# Altium PCB Ultrasound.PcbDoc
Units mm, origin at the board's own origin, x right, y up, seen from the top; angles counter-clockwise.
Board outline 152.4 x 101.6 mm, 2 copper layers (Top Layer, Bottom Layer); 4 components, 4 nets, 10 pads, 2 vias.
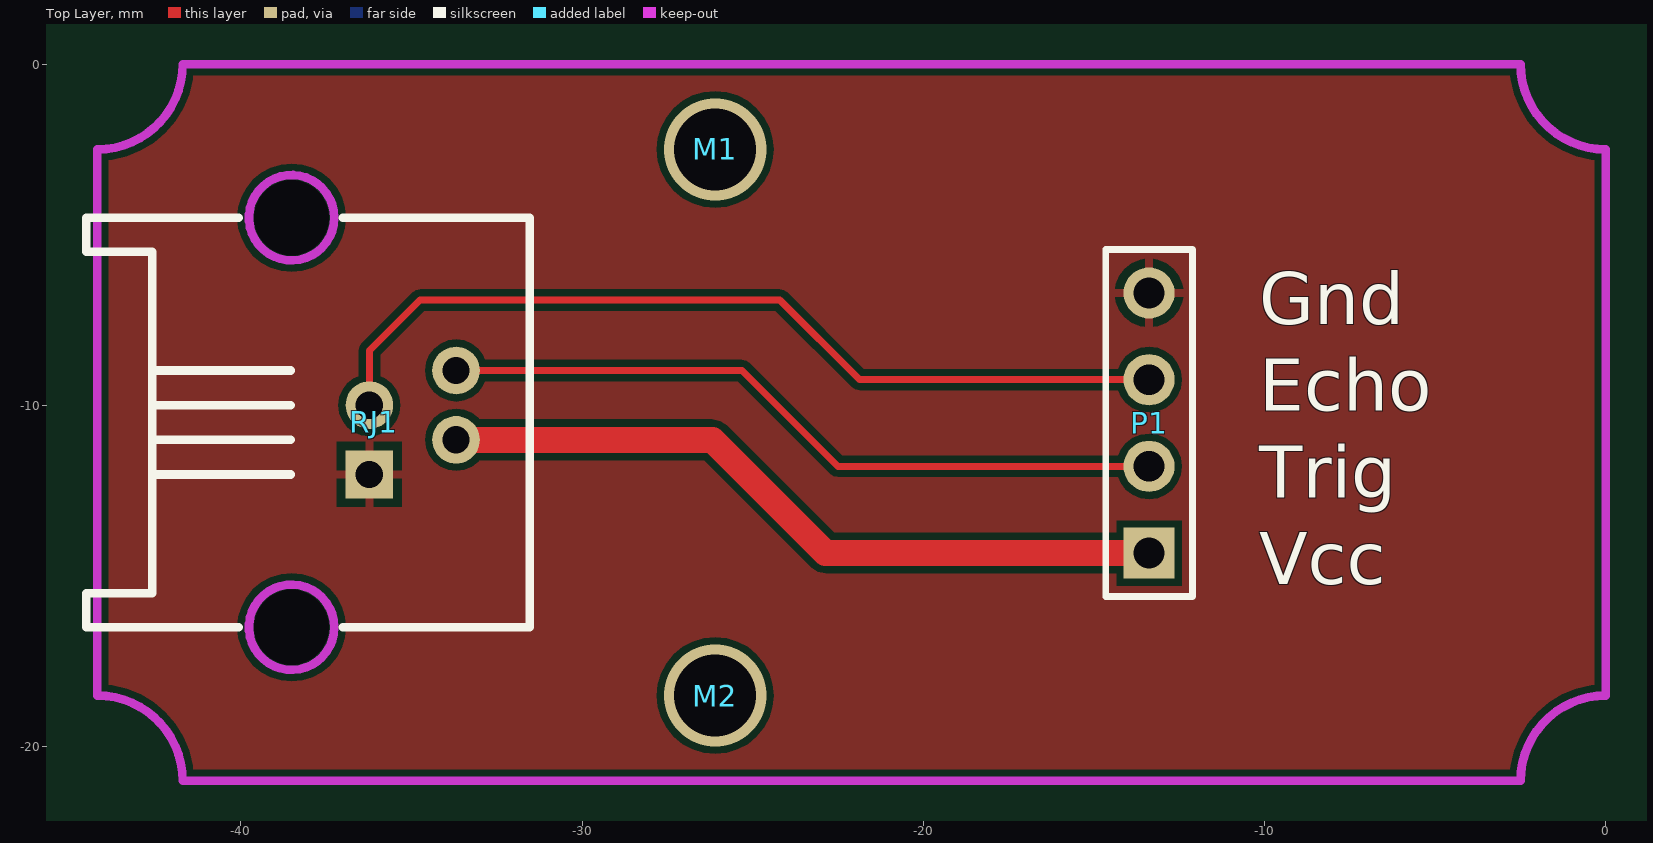
[diagram p0: Top Layer view]
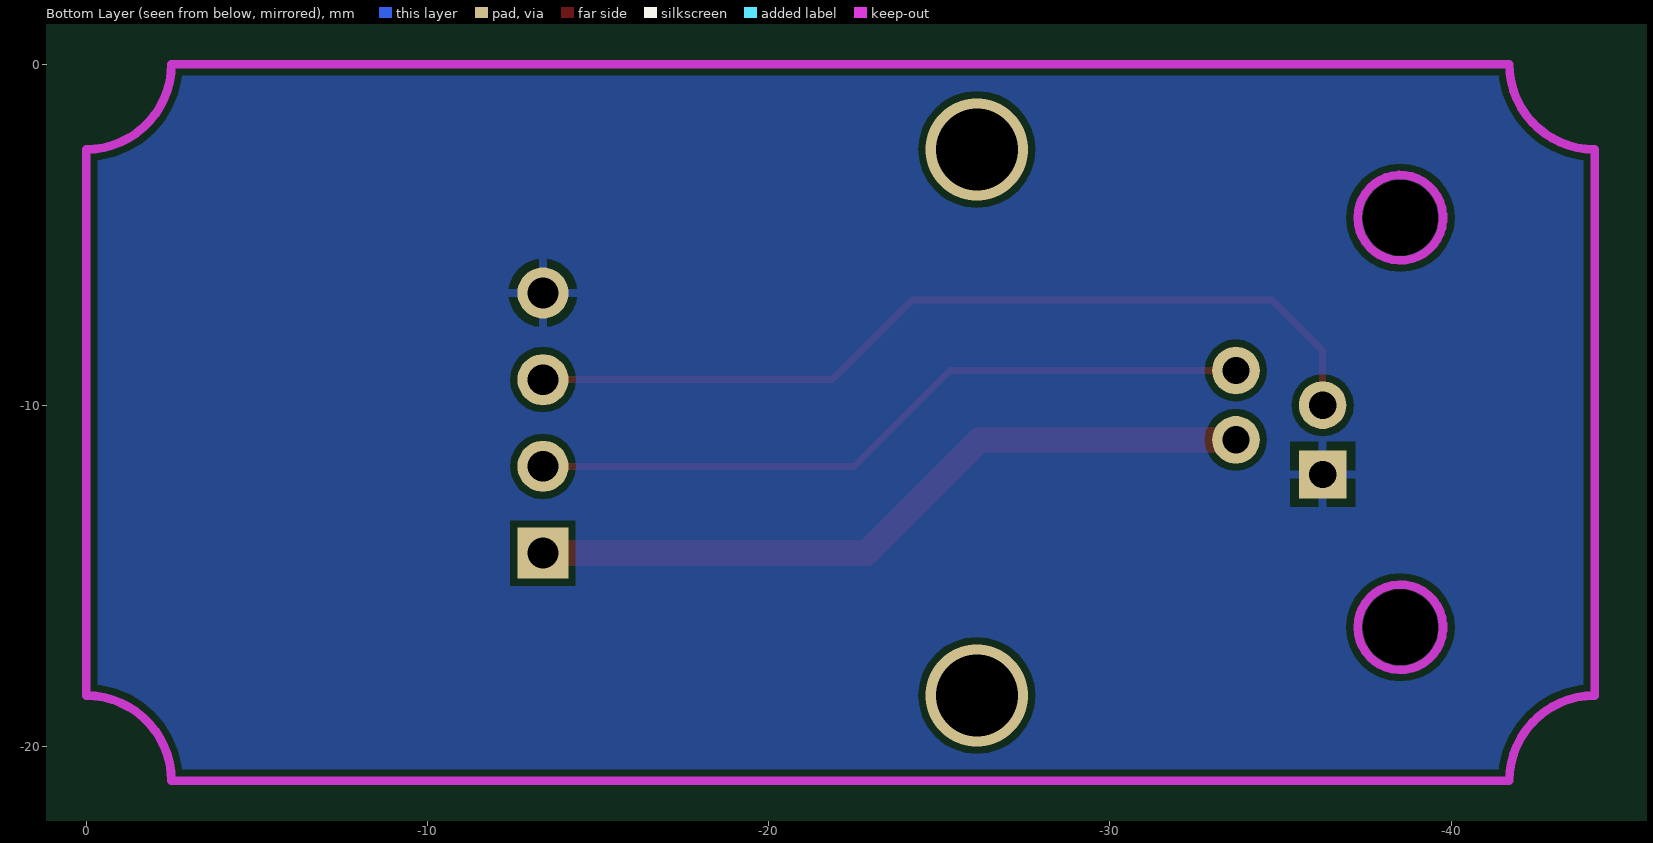
[diagram p1: Bottom Layer view, seen from below]

## Layer stack, top to bottom
Top Solder: solder mask 0.0102, Solder Resist, Dk 3.5
Top Layer: signal copper 0.0356
Dielectric 1: dielectric 0.32, FR-4, Dk 4.8
Bottom Layer: signal copper 0.0356
Bottom Solder: solder mask 0.0102, Solder Resist, Dk 3.5

## Board outline
-123.89,-45.807 28.51,-45.807 28.51,55.793 -123.89,55.793

## Design rules (kind name [scope] priority, off if disabled: settings)
Clearance [All] p1: gap=0.203
PolygonConnect [All] p1: connectstyle=Relief reliefconductorwidth=0.254 reliefentries=4 polygonreliefangle="90 Angle" airgapwidth=0.254
RoutingVias [All] p1: holewidth=0.711 width=1.27 viastyle="Through Hole" minholewidth=0.711 minwidth=1.27 maxholewidth=0.711 maxwidth=1.27
SolderMaskExpansion [All] p1: expansion=0.102
Width [All] p1: maxlimit=2.54 minlimit=0.203 preferedwidth=0.203
29 further rules are at their usual default settings.

## Components (designator, comment, footprint, x,y, rotation, side; value= is the part's Value field where it differs from the comment)
M1 "M2" M2 -26.1,-2.5 r0 top
M2 "M2" M2 -26.1,-18.5 r0 top
P1 "Header 4" HDR1X4 -13.386,-14.326 r90 top
RJ1 "RJ11" RJ11 -36.1,-10.5 r90 top

## Footprints (in the part's own frame and the unit in brackets; to place one, negate y for a bottom-side part, rotate by r counter-clockwise, add the part's x,y. Pads: shape width x height; smd on the part's side, far side on the other; paste and mask are expansions set on the pad)
HDR1X4 [mm] "Connector; Header; 4 Position"
  rect 1.5x1.5 hole 0.9: 1(0,0)
  round 1.5 hole 0.9: 2(2.54,0) 3(5.08,0) 4(7.62,0)
  silkscreen extent -1.27,-1.27 8.89,1.27
M2 [mm]
RJ11 [mm]
  round 2.1 hole 2.2 unplated: 0(-6,2.41) 0(6,2.41)
  rect 1.397x1.397 hole 0.8: 1(-1.524,0.13)
  round 1.397 hole 0.8: 2(-0.508,-2.41) 3(0.508,0.13) 4(1.524,-2.41)
  Keep-Out Layer circle w0.254: c-6,2.41 r1.25
  Keep-Out Layer circle w0.254: c6,2.41 r1.25
  silkscreen extent -6,-4.57 6,8.43

## Part data
M1 M2: library part M3
P1: "Header, 4-Pin"

## Via types
v1: diameter 3, hole 2.4, Top Layer to Bottom Layer, 2 vias

## Nets (pads, with @x,y where several pads share a name; then routed paths per layer and width w, separated by ;. In a path a pad name is that pad's centre, name@x,y a point inside that pad or via, vN(x,y) a via of type N, cw(c..) or ccw(c..) an arc to the next point about the centre after c; other vN are vias at no path point)
ECHO: P1.3 RJ1.3 | length 26
  Top Layer w0.203: RJ1.3 -36.23,-8.392 -34.747,-6.909 -24.206,-6.909 -21.869,-9.246 P1.3
GND: P1.4 RJ1.1
TRIG: P1.2 RJ1.4 | length 21.5
  Top Layer w0.203: RJ1.4 -25.314,-8.976 -22.504,-11.786 P1.2
VCC: P1.1 RJ1.2 | length 21.7
  Top Layer w0.762: RJ1.2 -26.178,-11.008 -22.86,-14.326 P1.1
pads on no net: RJ1.0
copper on no net:
  other v1: -26.1,-18.5 -26.1,-2.5

## Polygon pours and split planes (outlines as drawn)
GND on Top Layer "Top Layer-No Net" (solid, remove dead copper, pour order 2): -45.72,2.54 2.54,2.54 2.54,-22.86 -45.72,-22.86
GND on Bottom Layer "Top Layer-No Net" (solid, remove dead copper, pour order 4): -45.72,2.54 5.08,2.54 5.08,-22.86 -45.72,-22.86

## Keep-outs
Keep-Out Layer:
  lines w0.254: -44.2,-18.5 cw(c-44.2,-21) -41.7,-21 -2.5,-21 cw(c0,-21) 0,-18.5 0,-2.5 cw(c0,0) -2.5,0 -41.7,0 cw(c-44.2,0) -44.2,-2.5 -44.2,-18.5

## Silkscreen, mask and mechanical layers (free items; w line width, h text height)
Top Overlay:
  text "Gnd" at -10.16,-7.62 h1.52
  text "Echo" at -10.16,-10.16 h1.52
  text "Trig" at -10.16,-12.7 h1.52
  text "Vcc" at -10.16,-15.24 h1.52

## Text inside footprints (layer, text, board x,y; h text height)
RJ1: Mechanical 1 "1" at -38.53,-12.278 h1 r270; Mechanical 1 "2" at -32.942,-11.262 h1 r270; Mechanical 1 "3" at -38.53,-10.246 h1 r270; Mechanical 1 "4" at -32.942,-9.23 h1 r270; Mechanical 1 "1" at -43.102,-12.532 h1 r270; Mechanical 1 "4" at -43.102,-8.976 h1 r270